# Altium PCB busanaliz.PcbDoc (part 2 of 2)
Units mm, origin at the board's own origin, x right, y up, seen from the top; angles counter-clockwise.
Board outline 118.11 x 70.87 mm, 4 copper layers (Component Side, Ground Plane, Power Plane, Solder Side), stack 0.862 mm thick; 100 components, 87 nets, 527 pads, 174 vias.
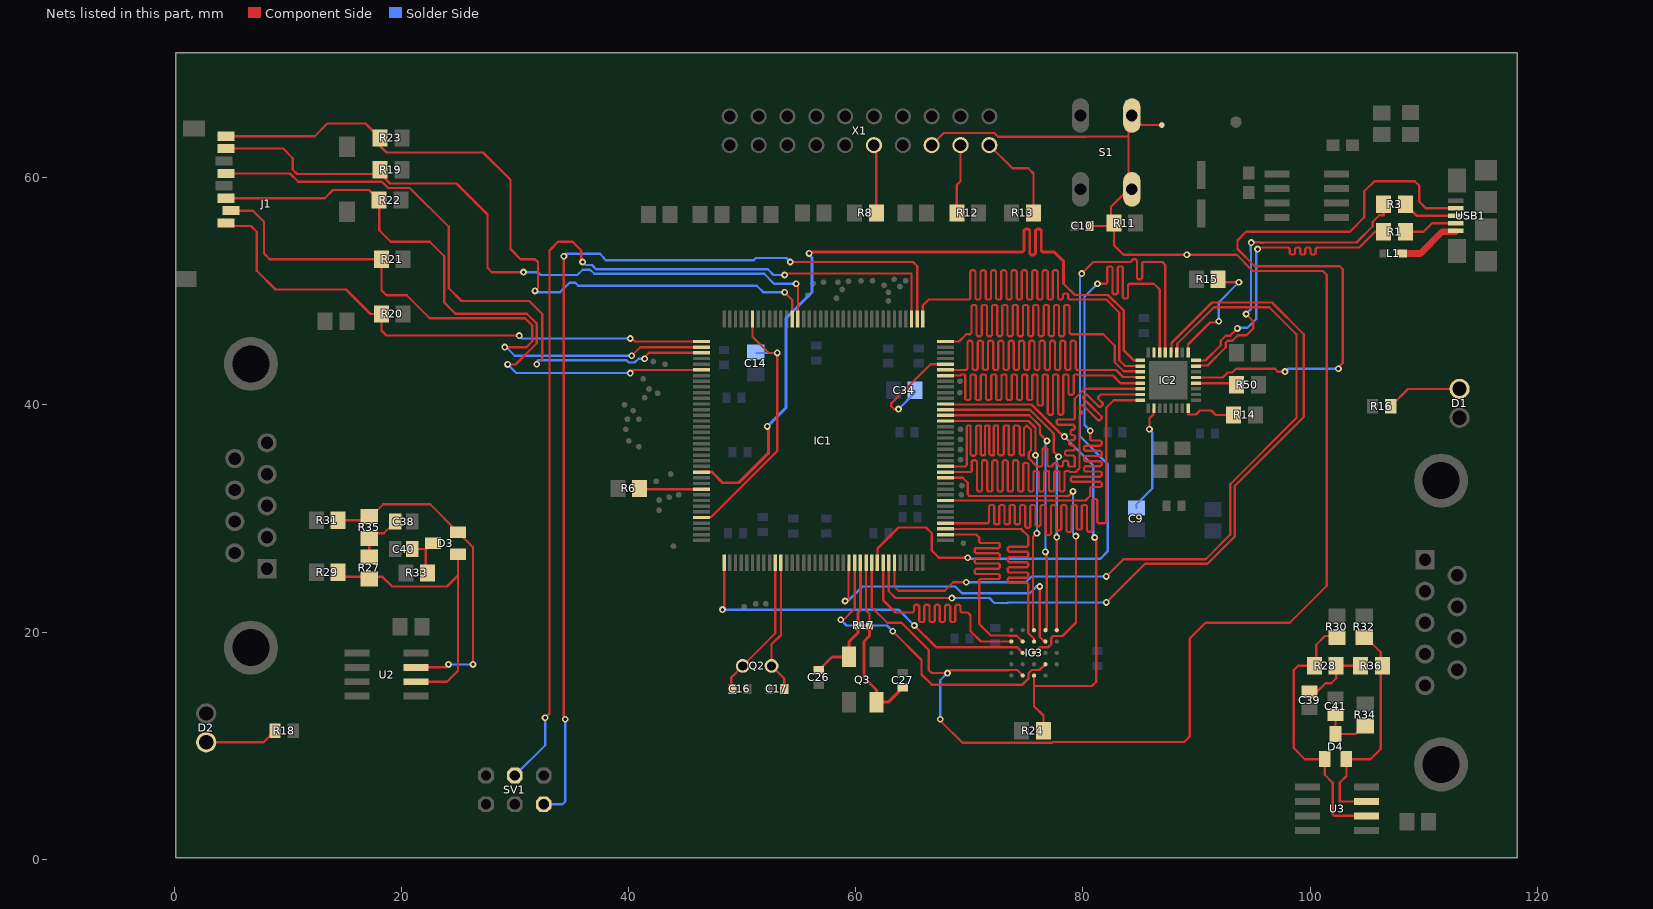
[diagram p4: the nets of this part, all layers, seen from the top]

## Via types
v1: diameter 0.6, hole 0.3, Component Side to Solder Side, 174 vias

## Nets (pads, with @x,y where several pads share a name; then routed paths per layer and width w, separated by ;. In a path a pad name is that pad's centre, name@x,y a point inside that pad or via, vN(x,y) a via of type N, cw(c..) or ccw(c..) an arc to the next point about the centre after c; other vN are vias at no path point) (continued)
NetC9_1: C9.1 IC2.26 | length 9.6
  Component Side w0.2: v1(85.852,37.846) 85.852,38.814 86.203,39.165 IC2.26@86.203,39.664
  Solder Side w0.2: C9.1@84.709,30.922 84.709,31.242 86.106,32.639 86.106,37.592 v1(85.852,37.846)
NetC16_2: C16.2 IC1.10 Q2.2 | length 12.8
  Component Side w0.2: C16.2@49.124,14.986 49.022,15.088 49.022,16.002 Q2.2@50.038,17.018 52.9,19.88 IC1.10@52.9,26.092
NetC17_2: C17.2 IC1.11 Q2.1 | length 11.9
  Component Side w0.2: IC1.11@53.4,26.092 53.4,19.745 52.578,18.923 Q2.1@52.578,17.018 53.695,15.901 C17.2@53.695,14.986
NetC26_1: C26.1 IC1.25 Q3.P$1 R17.2 | length 11.8
  Component Side w0.254: C26.1@56.743,16.652 57.899,17.808 Q3.P$1@59.411,17.808 59.411,19.152 60.198,19.939 R17.2@60.198,20.574 60.198,21.717 60.4,21.919 IC1.25@60.4,26.092
NetC27_1: C27.1 IC1.26 Q3.P$3 R17.1 | length 15.9
  Component Side w0.2: IC1.26@60.9,26.092 60.9,21.904 61.206,21.598 R17.1@61.206,20.574
  Component Side w0.254: R17.1@61.206,20.574 61.206,19.677 60.706,19.177 60.706,16.002 61.824,14.884 Q3.P$3@61.824,13.821 62.858,13.821 C27.1@64.135,15.098
NetC34_1: C34.1 IC1.68 | length 9.4
  Component Side w0.2: v1(63.754,39.624) 63.373,39.624 63.119,39.878 63.119,40.132 66.567,43.58 IC1.68@67.888,43.58
  Solder Side w0.2: v1(63.754,39.624) 65.212,41.082 C34.1@65.212,41.275
NetC38_1: C38.1 R27.1 R35.2 | length 4.7
  Component Side w0.2: R27.1@17.145,26.454 R27.1@17.145,26.604 R35.2@17.145,28.245 17.602,28.702 18.427,28.702 C38.1@19.443,29.718
NetC39_1: C39.1 R28.1 R36.2 | length 6.2
  Component Side w0.2: C39.1@99.949,14.72 100.572,14.72 101.346,15.494 101.854,15.494 102.296,15.936 R28.1@102.296,17.018 R36.2@104.445,17.018 R36.2@104.61,17.018
NetC40_1: C40.1 D3.3 R33.2 | length 3.9
  Component Side w0.2: C40.1@20.543,27.305 22.25,27.305 22.136,27.191 R33.2@22.136,25.199
NetC41_1: C41.1 D4.3 R34.2 | length 4.7
  Component Side w0.2: C41.1@102.235,12.712 D4.3@102.235,11.024 103.988,11.024 R34.2@104.864,11.9
NetD1_1: D1.1 R16.2 | length 6.7
  Component Side w0.2: R16.2@107.099,39.878 108.623,41.402 D1.1@113.157,41.402
NetD2_1: D2.1 R18.2 | length 6.5
  Component Side w0.2: D2.1@2.794,10.287 7.836,10.287 R18.2@8.852,11.303
NetD3_1: D3.1 R27.2 R29.1 U2.6 | length 26
  Component Side w0.2: R29.1@14.262,25.273 14.262,25.235 14.643,24.854 17.145,24.854 18.326,24.854 19.177,24.003 24.003,24.003 24.976,24.976 ; U2.6@21.285,15.621 24.003,15.621 24.976,16.594 24.976,24.976 ; D3.1@24.976,26.863 24.976,24.976
NetD3_2: D3.2 R31.1 R35.1 U2.7 | length 29.6
  Component Side w0.2: R31.1@14.262,29.845 R31.1@14.412,29.845 16.98,29.845 18.377,31.242 22.512,31.242 D3.2@24.976,28.778 26.289,27.465 v1(26.289,17.145) ; U2.7@21.285,16.891 23.876,16.891 v1(24.13,17.145)
  Solder Side w0.2: v1(24.13,17.145) v1(26.289,17.145)
NetD4_1: D4.1 R28.2 R30.1 U3.6 | length 24.3
  Component Side w0.2: R28.2@100.381,17.018 98.933,17.018 98.552,16.637 98.552,9.779 99.525,8.806 D4.1@101.285,8.806 101.285,7.427 101.981,6.731 101.981,3.937 102.108,3.81 U3.6@104.978,3.81 ; R28.2@100.546,17.018 100.546,18.885 101.308,19.647 102.362,19.647 R30.1@102.362,19.558
NetD4_2: D4.2 R32.1 R36.1 U3.7 | length 20.3
  Component Side w0.2: R32.1@104.775,19.647 106.21,18.212 106.21,9.69 105.326,8.806 D4.2@103.2,8.806 103.2,7.315 102.616,6.731 102.616,5.08 U3.7@104.978,5.08
NetIC1_135: IC1.135 R6.2 | length 5.5
  Component Side w0.2: R6.2@40.97,32.639 41.029,32.58 IC1.135@46.412,32.58
NetIC2_4: IC2.4 R50.2 | length 3.4
  Component Side w0.2: IC2.4@89.953,41.914 R50.2@93.392,41.914
NetIC2_9: IC2.9 R15.2 | length 10.4
  Component Side w0.2: IC2.9@89.253,44.614 89.253,45.311 91.186,47.244 91.948,47.244 v1(91.948,47.371) ; R15.2@91.897,51.054 92.151,50.8 v1(93.726,50.8)
  Solder Side w0.2: v1(91.948,47.371) 91.948,49.022 v1(93.726,50.8)
NetIC2_32: IC2.32 R14.2 | length 4.9
  Component Side w0.2: IC2.32@89.253,39.714 89.253,39.144 89.944,39.144 90.297,39.497 91.313,39.497 91.694,39.116 R14.2@93.269,39.116
NetL1_1: L1.1 USB1.V | length 5.5
  Component Side w0.6: L1.1@108.09,53.34 109.728,53.34 111.633,55.245 USB1.V@112.821,55.245
NetR1_1: R1.1 USB1.D- | length 4.7
  Component Side w0.2: R1.1@108.392,55.245 109.982,55.245 110.739,56.002 USB1.D-@112.821,56.002
NetR3_1: R3.1 USB1.D+ | length 4.8
  Component Side w0.2: R3.1@108.392,57.658 109.408,56.642 USB1.D+@112.821,56.642
NetR8_2: R8.2 X1.11 | length 6.1
  Component Side w0.2: X1.11@61.595,62.865 61.798,62.662 R8.2@61.798,56.896
NetR12_2: R12.2 X1.17 | length 6.1
  Component Side w0.2: R12.2@68.885,56.896 68.885,59.36 69.215,59.69 X1.17@69.215,62.865
NetR13_2: R13.2 X1.19 | length 8.4
  Component Side w0.2: X1.19@71.755,62.865 73.787,60.833 75.184,60.833 75.641,60.376 R13.2@75.641,56.896
OCTO_CLK: IC1.24 IC3.B2 | length 27.9
  Component Side w0.2: v1(58.674,21.082) 58.801,20.955 59.909,22.063 59.909,26.083 IC1.24@59.9,26.092 ; v1(63.246,20.066) 65.786,17.526 65.786,16.256 66.675,15.367 74.676,15.367 75.207,15.898 75.207,16.362 75.491,16.646 76.177,16.646 IC3.B2@76.692,17.161
  Solder Side w0.2: v1(58.674,21.082) 59.182,20.574 62.738,20.574 v1(63.246,20.066)
OCTO_DQS: IC1.48 IC3.C3 | length 29.1
  Component Side w0.2: IC1.48@67.888,33.58 69.417,33.58 69.85,33.147 69.85,32.131 70.001,31.98 78.716,31.98 v1(79.121,32.385) ; IC3.C3@75.692,18.161 76.2,18.669 76.962,18.669 77.207,18.914 77.207,19.498 77.355,19.646 78.193,19.646 79.375,20.828 v1(79.375,28.448)
  Solder Side w0.2: 79.121,28.702 v1(79.121,32.385)
OCTO_IO0: IC1.39 IC3.D3 | length 30.4
  Component Side w0.2: IC1.39@67.888,29.08 74.552,29.08 75.184,28.448 75.184,28.194 75.184,27.967 75.184,27.627 75.071,27.513 73.493,27.513 73.379,27.4 73.379,27.173 73.493,27.059 75.071,27.059 75.184,26.946 75.184,26.719 75.071,26.605 73.493,26.605 73.379,26.492 73.379,26.265 73.493,26.151 75.071,26.151 75.184,26.038 75.184,25.811 75.071,25.697 73.493,25.697 73.379,25.584 73.379,25.357 73.493,25.243 75.071,25.243 75.184,25.13 75.184,24.903 75.071,24.789 73.493,24.789 73.379,24.676 73.379,24.449 73.493,24.335 75.071,24.335 75.184,24.222 75.184,23.881 75.184,23.495 75.184,19.921 75.692,19.413 IC3.D3@75.692,19.161
OCTO_IO1: IC1.23 IC3.D2 | length 26.8
  Component Side w0.2: v1(59.055,22.733) 59.309,22.733 59.35,22.774 IC1.23@59.35,26.042 ; v1(76.2,24.003) 76.2,19.558 76.597,19.161 IC3.D2@76.692,19.161
  Solder Side w0.2: v1(59.055,22.733) 59.309,22.733 60.579,24.003 68.747,24.003 69.347,23.403 75.317,23.403 75.917,24.003 v1(76.2,24.003)
OCTO_IO2: IC1.1 IC3.C4 | length 32.1
  Component Side w0.2: v1@48.4,21.971 IC1.1@48.4,26.092 ; v1(65.151,20.574) 67.056,18.669 74.184,18.669 IC3.C4@74.692,18.161
  Solder Side w0.2: v1(48.26,21.971) 63.754,21.971 v1(65.151,20.574)
OCTO_IO3: IC1.38 IC3.D4 | length 31
  Component Side w0.2: IC1.38@67.888,28.58 70.607,28.58 70.866,28.321 70.866,28.067 70.866,27.953 70.979,27.84 72.557,27.84 72.671,27.726 72.671,27.499 72.557,27.386 70.866,27.386 70.572,27.386 70.458,27.272 70.458,27.045 70.572,26.932 70.866,26.932 72.557,26.932 72.671,26.818 72.671,26.591 72.557,26.478 70.866,26.478 70.572,26.478 70.458,26.364 70.458,26.137 70.572,26.024 70.866,26.024 72.557,26.024 72.671,25.91 72.671,25.683 72.557,25.57 70.866,25.57 70.572,25.57 70.458,25.456 70.458,25.229 70.572,25.116 70.866,25.116 72.557,25.116 72.671,25.003 72.671,24.776 72.557,24.662 70.979,24.662 70.866,24.549 70.866,24.208 70.866,24.13 70.866,20.701 71.882,19.685 73.482,19.685 73.491,19.676 74.177,19.676 IC3.D4@74.692,19.161
OCTO_IO4: IC1.29 IC3.D5 | length 29.1
  Component Side w0.2: IC1.29@62.4,26.092 62.4,22.817 63.5,21.717 64.897,21.717 65.01,21.717 65.124,21.83 65.124,22.292 65.237,22.406 65.464,22.406 65.578,22.292 65.578,21.717 65.578,20.999 65.691,20.885 65.918,20.885 66.032,20.999 66.032,21.717 66.032,22.292 66.145,22.406 66.372,22.406 66.486,22.292 66.486,21.717 66.486,20.999 66.599,20.885 66.826,20.885 66.94,20.999 66.94,21.717 66.94,22.292 67.053,22.406 67.28,22.406 67.394,22.292 67.394,21.717 67.394,20.999 67.507,20.885 67.734,20.885 67.848,20.999 67.848,21.717 67.848,22.292 67.961,22.406 68.188,22.406 68.302,22.292 68.302,21.717 68.302,20.999 68.415,20.885 68.642,20.885 68.756,20.999 68.756,21.717 68.756,22.292 68.869,22.406 69.096,22.406 69.21,22.292 69.21,21.83 69.323,21.717 69.596,21.717 69.85,21.717 70.104,21.463 70.104,20.066 71.009,19.161 IC3.D5@73.692,19.161
OCTO_IO5: IC1.58 IC3.E3 | length 26.5
  Component Side w0.2: IC1.58@67.888,38.58 75.212,38.58 75.819,37.973 v1(75.819,35.56) ; IC3.E3@75.692,20.161 75.6,20.253 75.6,28.356 v1(75.946,28.702)
  Solder Side w0.2: v1(75.819,35.56) 75.946,35.687 v1(75.946,28.702)
OCTO_IO6: IC1.59 IC3.E2 | length 27.1
  Component Side w0.2: IC1.59@67.888,39.08 75.278,39.08 76.219,38.139 76.219,37.446 v1(76.835,36.83) ; IC3.E2@76.692,20.161 76.8,20.269 76.8,26.943 v1(76.692,27.051)
  Solder Side w0.2: v1(76.692,27.051) 76.692,36.687 v1(76.835,36.83)
OCTO_IO7: IC1.60 IC3.E1 | length 28.2
  Component Side w0.2: IC1.60@67.888,39.58 75.343,39.58 77.435,37.488 77.435,35.849 v1(77.851,35.433) ; IC3.E1@77.692,20.161 v1(77.692,28.353)
  Solder Side w0.2: v1(77.692,28.353) 77.692,35.147 77.978,35.433 v1(77.851,35.433)
OCTO_NCS: IC1.61 IC3.A3 R24.1 | length 45.3
  Component Side w0.2: IC1.61@67.888,40.08 67.938,40.03 75.459,40.03 78.151,37.338 78.359,37.338 v1(78.359,37.211) ; IC3.A3@75.692,16.161 75.692,15.24 ; R24.1@76.515,11.303 76.515,12.639 75.692,13.462 75.692,15.24 ; v1(81.026,28.321) 81.172,28.175 81.172,15.621 80.791,15.24 75.692,15.24
  Solder Side w0.2: v1(78.359,37.211) 80.899,34.671 80.899,28.448 v1(81.026,28.321)
RESET: C10.1 IC1.27 IC3.A4 pad.68 R11.2 S1.3 S1.4 X1.15 | length 153.5
  Component Side w0.2: IC1.27@61.4,26.092 61.4,22.166 62.757,20.809 64.027,20.809 66.421,18.415 66.421,16.637 66.675,16.383 v1(68.072,16.383) 68.326,16.637 73.482,16.637 73.491,16.646 74.207,16.646 IC3.A4@74.692,16.161 ; X1.15@66.675,62.865 67.74,63.93 72.196,63.93 72.523,63.603 80.244,63.603 80.267,63.627 83.998,63.627 ; v1(67.437,12.319) 67.437,12.192 69.388,10.241 77.3,10.241 77.365,10.306 88.919,10.306 89.408,10.795 89.408,19.431 90.786,20.809 98.21,20.809 101.473,24.072 101.473,51.435 101.111,51.797 94.957,51.797 93.541,53.213 v1(89.154,53.213) 83.566,53.213 82.728,54.051 R11.2@82.728,56.007 ; C10.1@80.584,55.753 82.474,55.753 82.474,57.455 83.998,58.979 83.998,63.627 ; pad.68@86.944,64.643 85.141,64.643 S1.4@84.303,65.481 83.998,65.176 83.998,63.627
  Solder Side w0.2: v1(67.437,12.319) 67.437,15.748 v1(68.072,16.383)
SD_CLK: IC1.111 J1.5 | length 56.1
  Component Side w0.2: J1.5@4.552,60.382 10.173,60.382 10.91,59.644 18.276,59.644 18.819,59.101 20.728,59.101 24.149,55.68 24.149,50.273 25.273,49.149 31.242,49.149 32.385,48.006 32.385,44.069 v1(31.896,43.58) ; v1(41.402,44.069) 41.402,44.196 41.786,44.58 IC1.111@46.412,44.58
  Solder Side w0.2: v1(31.896,43.58) 31.896,43.815 32.004,43.923 39.81,43.923 40.01,43.723 40.508,43.723 40.854,44.069 v1(41.402,44.069)
SD_CMD: IC1.114 J1.3 R22.1 | length 59
  Component Side w0.2: J1.3@4.552,58.197 13.239,58.197 13.97,58.928 17.14,58.928 R22.1@18.029,58.039 18.029,55.377 19.05,54.356 22.479,54.356 23.749,53.086 23.749,49.022 24.746,48.025 31.027,48.025 31.896,47.156 31.896,45.427 30.03,43.561 v1(29.337,43.561) ; v1(40.132,42.799) 40.413,43.08 IC1.114@46.412,43.08
  Solder Side w0.2: v1(29.337,43.561) 30.099,42.799 v1(40.132,42.799)
SD_D0: IC1.95 J1.7 R19.1 | length 62.3
  Component Side w0.2: J1.7@4.552,62.566 9.57,62.566 10.414,61.722 10.414,60.706 10.795,60.325 18.161,60.325 18.985,59.501 24.827,59.501 27.559,56.769 27.559,52.07 27.94,51.689 v1(30.734,51.689) ; v1(54.737,50.673) 54.737,50.8 54.9,50.637 IC1.95@54.9,47.568
  Solder Side w0.2: v1(30.734,51.689) 32.004,51.689 32.258,51.435 35.473,51.435 35.946,51.908 36.594,51.908 36.962,51.54 51.925,51.54 52.792,50.673 v1(54.737,50.673)
SD_D1: IC1.96 J1.8 R23.1 | length 64.9
  Component Side w0.2: J1.8@4.552,63.658 12.35,63.658 13.462,64.77 16.83,64.77 R23.1@18.1,63.5 18.1,62.799 18.669,62.23 27.178,62.23 29.591,59.817 29.591,53.721 30.48,52.832 31.75,52.832 32.004,52.578 32.004,50.292 v1(31.75,50.038) ; v1(53.721,49.911) 54.4,49.232 IC1.96@54.4,47.568
  Solder Side w0.2: v1(31.75,50.038) 31.877,49.911 33.949,49.911 34.803,50.765 35.301,50.765 35.566,50.5 51.267,50.5 51.856,49.911 v1(53.721,49.911)
SD_D2: IC1.109 J1.1 R20.1 | length 49.2
  Component Side w0.2: J1.1@4.552,56.013 4.812,55.753 6.731,55.753 7.239,55.245 7.239,51.816 8.89,50.165 15.113,50.165 17.272,48.006 R20.1@18.227,48.006 18.227,46.543 18.669,46.101 v1(30.353,46.101) ; v1(40.132,45.847) 40.132,45.974 40.526,45.58 IC1.109@46.412,45.58
  Solder Side w0.2: v1(30.353,46.101) 30.607,45.847 v1(40.132,45.847)
SD_D3: IC1.110 J1.2 R21.1 | length 55.9
  Component Side w0.2: J1.2@4.959,57.105 6.903,57.105 7.874,56.134 7.874,53.34 8.382,52.832 R21.1@18.227,52.832 18.227,50.099 18.669,49.657 20.447,49.657 22.479,47.625 30.861,47.625 31.496,46.99 31.496,45.593 30.988,45.085 v1(29.083,45.085) ; v1(40.259,44.323) 41.016,45.08 IC1.110@46.412,45.08
  Solder Side w0.2: v1(29.083,45.085) 29.21,45.085 29.972,44.323 v1(40.259,44.323)
ULPI_CK: IC1.44 IC2.14 | length 68.8
  Component Side w0.2: IC1.44@67.888,31.58 80.221,31.58 80.645,32.004 80.645,32.385 80.645,32.658 80.758,32.771 81.529,32.771 81.642,32.885 81.642,33.112 81.529,33.225 80.645,33.225 79.035,33.225 78.922,33.339 78.922,33.566 79.035,33.679 80.645,33.679 81.529,33.679 81.642,33.793 81.642,34.02 81.529,34.133 80.645,34.133 80.197,34.133 80.084,34.247 80.084,34.474 80.197,34.587 80.645,34.587 81.529,34.587 81.642,34.701 81.642,34.928 81.529,35.041 80.645,35.041 80.197,35.041 80.084,35.155 80.084,35.382 80.197,35.495 80.645,35.495 81.529,35.495 81.642,35.609 81.642,35.836 81.529,35.949 80.645,35.949 80.197,35.949 80.084,36.063 80.084,36.29 80.197,36.403 80.645,36.403 81.529,36.403 81.642,36.517 81.642,36.744 81.529,36.857 80.758,36.857 80.645,36.971 80.645,37.084 v1(80.645,37.719) ; v1(81.28,50.673) 81.915,50.673 82.028,50.673 82.142,50.786 82.142,52.064 82.255,52.178 82.482,52.178 82.596,52.064 82.596,50.673 82.596,49.853 82.709,49.74 82.936,49.74 83.05,49.853 83.05,50.673 83.05,52.064 83.163,52.178 83.39,52.178 83.504,52.064 83.504,50.673 83.504,49.49 83.617,49.376 83.844,49.376 83.958,49.49 83.958,50.56 84.071,50.673 84.074,50.673 84.582,50.673 86.233,50.673 86.753,50.153 IC2.14@86.753,44.614
  Solder Side w0.2: v1(80.645,37.719) 80.137,38.227 80.137,49.53 v1(81.28,50.673)
ULPI_D0: IC1.40 IC2.24 | length 70.4
  Component Side w0.2: IC1.40@67.888,29.58 71.501,29.58 71.614,29.58 71.728,29.693 71.728,31.067 71.841,31.18 72.068,31.18 72.182,31.067 72.182,29.58 72.282,29.48 72.536,29.48 72.636,29.58 72.636,31.067 72.749,31.18 72.976,31.18 73.09,31.067 73.09,29.58 73.19,29.48 73.444,29.48 73.544,29.58 73.544,31.067 73.657,31.18 73.884,31.18 73.998,31.067 73.998,29.58 74.098,29.48 74.352,29.48 74.452,29.58 74.452,31.067 74.565,31.18 74.792,31.18 74.906,31.067 74.906,29.58 74.906,29.292 75.019,29.178 75.246,29.178 75.36,29.292 75.36,29.58 75.36,31.067 75.473,31.18 75.7,31.18 75.814,31.067 75.814,29.58 75.814,29.415 75.927,29.302 76.154,29.302 76.268,29.415 76.268,29.58 76.268,31.067 76.381,31.18 76.608,31.18 76.722,31.067 76.722,29.58 76.722,28.659 76.835,28.546 77.062,28.546 77.176,28.659 77.176,29.58 77.176,31.067 77.289,31.18 77.516,31.18 77.63,31.067 77.63,29.58 77.63,29.064 77.743,28.951 77.97,28.951 78.084,29.064 78.084,29.58 78.084,31.067 78.197,31.18 78.424,31.18 78.538,31.067 78.538,29.58 78.538,28.913 78.651,28.8 78.878,28.8 78.992,28.913 78.992,29.58 78.992,31.067 79.105,31.18 79.332,31.18 79.446,31.067 79.446,29.58 79.446,29.132 79.559,29.019 79.786,29.019 79.9,29.132 79.9,29.58 79.9,31.067 80.013,31.18 80.24,31.18 80.354,31.067 80.354,29.58 80.354,28.935 80.467,28.821 80.694,28.821 80.808,28.935 80.808,29.58 80.808,31.601 80.921,31.715 81.148,31.715 81.262,31.601 81.262,29.693 81.375,29.58 81.661,29.58 81.904,29.58 82.042,29.718 82.042,39.751 82.705,40.414 IC2.24@85.053,40.414
ULPI_D1: IC1.49 IC2.23 | length 71.3
  Component Side w0.2: IC1.49@67.888,34.08 69.977,34.08 ; 69.215,34.08 69.977,34.08 ; IC2.23@85.053,40.914 81.554,40.914 81.344,40.704 81.344,40.544 81.728,40.16 81.728,39.999 81.568,39.839 81.407,39.839 80.943,40.303 80.354,40.893 80.193,40.893 80.033,40.732 80.033,40.571 80.622,39.982 81.642,38.962 81.642,38.802 81.482,38.641 81.321,38.641 80.301,39.661 80.005,39.957 79.844,39.957 79.684,39.797 79.684,39.636 79.9,39.42 79.9,39.26 79.819,39.179 79.684,39.044 79.684,34.414 79.35,34.08 78.994,34.08 78.83,34.08 78.73,34.18 78.476,34.18 78.376,34.08 78.376,32.493 78.262,32.38 78.035,32.38 77.922,32.493 77.922,34.08 77.822,34.18 77.568,34.18 77.468,34.08 77.468,32.493 77.354,32.38 77.127,32.38 77.014,32.493 77.014,34.08 76.914,34.18 76.66,34.18 76.56,34.08 76.56,32.493 76.446,32.38 76.219,32.38 76.106,32.493 76.106,34.08 76.006,34.18 75.752,34.18 75.652,34.08 75.652,32.493 75.538,32.38 75.311,32.38 75.198,32.493 75.198,34.08 75.198,34.767 75.084,34.88 74.857,34.88 74.744,34.767 74.744,34.08 74.744,32.493 74.63,32.38 74.403,32.38 74.29,32.493 74.29,34.08 74.29,35.006 74.176,35.119 73.949,35.119 73.836,35.006 73.836,34.08 73.836,32.493 73.722,32.38 73.495,32.38 73.382,32.493 73.382,34.08 73.382,35.006 73.268,35.119 73.041,35.119 72.928,35.006 72.928,34.08 72.928,32.493 72.814,32.38 72.587,32.38 72.474,32.493 72.474,34.08 72.474,35.006 72.36,35.119 72.133,35.119 72.02,35.006 72.02,34.08 72.02,32.493 71.906,32.38 71.679,32.38 71.566,32.493 71.566,34.08 71.566,35.006 71.452,35.119 71.225,35.119 71.112,35.006 71.112,34.08 71.112,32.493 70.998,32.38 70.771,32.38 70.658,32.493 70.658,34.08 70.658,35.006 70.544,35.119 70.317,35.119 70.204,35.006 70.204,34.194 70.09,34.08 69.977,34.08
ULPI_D2: IC1.50 IC2.22 | length 70.4
  Component Side w0.2: IC1.50@67.888,34.58 69.632,34.58 69.765,34.713 69.765,38.003 69.764,38.004 69.764,38.094 69.85,38.18 70.104,38.18 70.104,35.646 70.231,35.519 70.444,35.519 70.612,35.687 70.612,38.1 70.692,38.18 70.993,38.18 70.993,35.646 71.079,35.56 71.374,35.56 71.374,38.1 71.454,38.18 71.755,38.18 71.755,35.687 71.882,35.56 72.136,35.56 72.136,38.1 72.216,38.18 72.517,38.18 72.517,35.687 72.644,35.56 72.898,35.56 73.025,35.687 73.025,38.1 73.105,38.18 73.453,38.18 73.453,35.64 73.533,35.56 73.787,35.56 73.914,35.687 73.914,38.1 73.994,38.18 74.295,38.18 74.422,38.053 74.422,35.687 74.549,35.56 74.803,35.56 74.803,37.937 75.046,38.18 75.419,37.807 75.419,36.009 75.219,35.809 75.219,35.311 75.95,34.58 76.2,34.58 76.313,34.58 76.427,34.694 76.427,36.12 76.54,36.234 76.767,36.234 76.881,36.12 76.881,34.694 76.994,34.58 77.221,34.58 77.335,34.694 77.335,34.746 77.448,34.859 77.675,34.859 77.789,34.746 77.789,34.694 77.902,34.58 78.129,34.58 78.243,34.694 78.243,34.977 78.356,35.09 78.583,35.09 78.697,34.977 78.697,34.694 78.81,34.58 79.151,34.58 79.284,34.58 79.284,35.306 79.284,35.419 79.17,35.533 78.525,35.533 78.412,35.646 78.412,35.873 78.525,35.987 79.17,35.987 79.284,36.1 79.284,36.327 79.17,36.441 78.891,36.441 78.778,36.554 78.778,36.781 78.891,36.895 79.17,36.895 79.284,37.008 79.284,37.235 79.17,37.349 79.017,37.349 78.904,37.462 78.904,37.689 79.017,37.803 79.17,37.803 79.284,37.916 79.284,38.143 79.17,38.257 77.798,38.257 77.684,38.37 77.684,38.597 77.798,38.711 79.17,38.711 79.284,38.824 79.284,38.989 79.284,40.549 80.149,41.414 IC2.22@85.053,41.414
ULPI_D3: IC1.66 IC2.21 | length 69.5
  Component Side w0.2: IC1.66@67.888,42.58 68.961,42.58 69.188,42.58 69.288,42.68 69.542,42.68 69.642,42.58 69.642,40.543 69.755,40.43 69.982,40.43 70.096,40.543 70.096,42.58 70.196,42.68 70.45,42.68 70.55,42.58 70.55,40.543 70.663,40.43 70.89,40.43 71.004,40.543 71.004,42.58 71.104,42.68 71.358,42.68 71.458,42.58 71.458,40.543 71.571,40.43 71.798,40.43 71.912,40.543 71.912,42.58 72.012,42.68 72.266,42.68 72.366,42.58 72.366,40.543 72.479,40.43 72.706,40.43 72.82,40.543 72.82,42.58 72.92,42.68 73.174,42.68 73.274,42.58 73.274,40.543 73.387,40.43 73.614,40.43 73.728,40.543 73.728,42.58 73.828,42.68 74.082,42.68 74.182,42.58 74.182,40.543 74.295,40.43 74.522,40.43 74.636,40.543 74.636,42.58 74.736,42.68 74.99,42.68 75.09,42.58 75.09,40.543 75.203,40.43 75.43,40.43 75.544,40.543 75.544,42.58 75.644,42.68 75.898,42.68 75.998,42.58 75.998,40.057 76.111,39.943 76.338,39.943 76.452,40.057 76.452,42.58 76.552,42.68 76.806,42.68 76.906,42.58 76.906,39.247 77.019,39.133 77.246,39.133 77.36,39.247 77.36,42.58 77.46,42.68 77.714,42.68 77.814,42.58 77.814,39.247 77.927,39.133 78.154,39.133 78.268,39.247 78.268,42.58 78.368,42.68 78.622,42.68 78.722,42.58 78.722,41.007 78.835,40.893 79.062,40.893 79.176,41.007 79.176,42.58 79.276,42.68 79.53,42.68 79.63,42.58 80.01,42.58 82.642,42.58 83.308,41.914 IC2.21@85.053,41.914
ULPI_D4: IC1.67 IC2.20 | length 70.9
  Component Side w0.2: IC1.67@67.888,43.08 69.596,43.08 69.709,43.08 69.823,43.194 69.823,45.533 69.936,45.647 70.163,45.647 70.277,45.533 70.277,43.194 70.39,43.08 70.617,43.08 70.731,43.194 70.731,45.533 70.844,45.647 71.071,45.647 71.185,45.533 71.185,43.194 71.298,43.08 71.525,43.08 71.639,43.194 71.639,45.533 71.752,45.647 71.979,45.647 72.093,45.533 72.093,43.194 72.206,43.08 72.433,43.08 72.547,43.194 72.547,45.533 72.66,45.647 72.887,45.647 73.001,45.533 73.001,43.194 73.114,43.08 73.341,43.08 73.455,43.194 73.455,45.533 73.568,45.647 73.795,45.647 73.909,45.533 73.909,43.194 74.022,43.08 74.249,43.08 74.363,43.194 74.363,45.533 74.476,45.647 74.703,45.647 74.817,45.533 74.817,43.194 74.93,43.08 75.157,43.08 75.271,43.194 75.271,45.533 75.384,45.647 75.611,45.647 75.725,45.533 75.725,43.194 75.838,43.08 76.065,43.08 76.179,43.194 76.179,45.533 76.292,45.647 76.519,45.647 76.633,45.533 76.633,43.194 76.746,43.08 76.973,43.08 77.087,43.194 77.087,45.533 77.2,45.647 77.427,45.647 77.541,45.533 77.541,43.194 77.654,43.08 77.881,43.08 77.995,43.194 77.995,45.533 78.108,45.647 78.335,45.647 78.449,45.533 78.449,43.194 78.562,43.08 78.789,43.08 78.903,43.194 78.903,45.533 79.016,45.647 79.243,45.647 79.357,45.533 79.357,43.194 79.47,43.08 79.811,43.08 79.883,43.08 82.916,43.08 83.532,42.464 IC2.20@85.003,42.464
ULPI_D5: IC1.72 IC2.19 | length 71.6
  Component Side w0.2: IC1.72@67.888,45.58 69.075,45.58 69.723,46.228 69.95,46.228 70.063,46.228 70.177,46.341 70.177,48.681 70.29,48.795 70.517,48.795 70.631,48.681 70.631,46.228 70.631,46.16 70.744,46.047 70.971,46.047 71.085,46.16 71.085,46.228 71.085,48.681 71.198,48.795 71.425,48.795 71.539,48.681 71.539,46.228 71.539,46.16 71.652,46.047 71.879,46.047 71.993,46.16 71.993,46.228 71.993,48.681 72.106,48.795 72.333,48.795 72.447,48.681 72.447,46.228 72.447,46.16 72.56,46.047 72.787,46.047 72.901,46.16 72.901,46.228 72.901,48.681 73.014,48.795 73.241,48.795 73.355,48.681 73.355,46.228 73.355,46.16 73.468,46.047 73.695,46.047 73.809,46.16 73.809,46.228 73.809,48.681 73.922,48.795 74.149,48.795 74.263,48.681 74.263,46.228 74.263,46.16 74.376,46.047 74.603,46.047 74.717,46.16 74.717,46.228 74.717,48.681 74.83,48.795 75.057,48.795 75.171,48.681 75.171,46.228 75.171,46.16 75.284,46.047 75.511,46.047 75.625,46.16 75.625,46.228 75.625,48.681 75.738,48.795 75.965,48.795 76.079,48.681 76.079,46.228 76.079,46.16 76.192,46.047 76.419,46.047 76.533,46.16 76.533,46.228 76.533,48.681 76.646,48.795 76.873,48.795 76.987,48.681 76.987,46.228 76.987,46.16 77.1,46.047 77.327,46.047 77.441,46.16 77.441,46.228 77.441,48.681 77.554,48.795 77.781,48.795 77.895,48.681 77.895,46.228 77.895,46.16 78.008,46.047 78.235,46.047 78.349,46.16 78.349,46.228 78.349,48.681 78.462,48.795 78.689,48.795 78.803,48.681 78.803,46.341 78.916,46.228 78.994,46.228 81.788,46.228 82.801,45.215 82.801,43.76 83.597,42.964 85.003,42.964 IC2.19@85.053,42.914
ULPI_D6: IC1.73 IC2.18 | length 70.1
  Component Side w0.2: IC1.73@65.9,47.568 65.9,48.755 66.421,49.276 69.85,49.276 69.963,49.276 70.077,49.389 70.077,51.729 70.19,51.843 70.417,51.843 70.531,51.729 70.531,49.389 70.644,49.276 70.871,49.276 70.985,49.389 70.985,51.729 71.098,51.843 71.325,51.843 71.439,51.729 71.439,49.389 71.552,49.276 71.779,49.276 71.893,49.389 71.893,51.729 72.006,51.843 72.233,51.843 72.347,51.729 72.347,49.389 72.46,49.276 72.687,49.276 72.801,49.389 72.801,51.729 72.914,51.843 73.141,51.843 73.255,51.729 73.255,49.389 73.368,49.276 73.595,49.276 73.709,49.389 73.709,51.729 73.822,51.843 74.049,51.843 74.163,51.729 74.163,49.389 74.276,49.276 74.503,49.276 74.617,49.389 74.617,51.729 74.73,51.843 74.957,51.843 75.071,51.729 75.071,49.389 75.184,49.276 75.411,49.276 75.525,49.389 75.525,51.729 75.638,51.843 75.865,51.843 75.979,51.729 75.979,49.389 76.092,49.276 76.319,49.276 76.433,49.389 76.433,51.729 76.546,51.843 76.773,51.843 76.887,51.729 76.887,49.389 77,49.276 77.227,49.276 77.341,49.389 77.341,51.729 77.454,51.843 77.681,51.843 77.795,51.729 77.795,49.389 77.908,49.276 78.135,49.276 78.249,49.389 78.249,49.698 78.362,49.812 78.589,49.812 78.703,49.698 78.703,49.389 78.816,49.276 79.157,49.276 79.248,49.276 82.042,49.276 83.201,48.117 83.201,43.926 83.713,43.414 IC2.18@85.053,43.414
ULPI_D7: IC1.132 IC2.17 | length 71
  Component Side w0.2: 78.294,50.673 79.291,49.676 82.208,49.676 83.601,48.283 83.601,44.796 84.483,43.914 IC2.17@85.053,43.914
  Component Side w0.254: IC1.132@46.412,34.08 47.327,34.08 48.26,33.147 49.687,33.147 52.324,35.784 52.324,38.1 v1(52.197,38.1) ; v1@56.007,53.467 74.549,53.467 74.676,53.467 74.803,53.594 74.803,55.372 74.93,55.499 75.184,55.499 75.311,55.372 75.311,53.467 75.311,53.34 75.438,53.213 75.692,53.213 75.819,53.34 75.819,53.467 75.819,55.372 75.946,55.499 76.2,55.499 76.327,55.372 76.327,53.594 76.454,53.467 76.708,53.467 77.47,53.467 78.294,52.643 78.294,50.673
  Solder Side w0.254: v1(52.197,38.1) 53.848,39.751 53.848,47.625 56.134,49.911 56.134,52.959 55.88,53.213 v1(55.88,53.34)
ULPI_DIR: IC1.30 IC2.12 | length 71.3
  Component Side w0.2: IC1.30@62.9,26.092 62.9,23.587 63.5,22.987 v1(68.453,22.987) ; v1(82.042,22.606) 85.452,26.016 90.971,26.016 93.364,28.409 93.364,32.854 99.441,38.931 99.441,46.212 96.647,49.006 91.363,49.006 87.803,45.446 87.803,44.614 IC2.12@87.753,44.614
  Solder Side w0.2: v1(68.453,22.987) 71.763,22.987 72.19,22.56 73.352,22.56 73.398,22.606 v1(82.042,22.606)
ULPI_NXT: IC1.31 IC2.11 | length 67.5
  Component Side w0.2: IC1.31@63.4,26.092 63.4,23.976 63.754,23.622 67.818,23.622 68.58,24.384 v1(69.723,24.384) ; v1(82.042,24.892) 83.566,26.416 90.805,26.416 92.964,28.575 92.964,33.02 98.806,38.862 98.806,46.228 ; IC2.11@88.253,44.614 88.303,44.664 88.303,45.38 91.529,48.606 96.393,48.606 98.771,46.228
  Solder Side w0.2: v1(69.723,24.384) 74.97,24.384 75.478,24.892 v1(82.042,24.892)
ULPI_STP: IC1.28 IC2.13 | length 68.9
  Component Side w0.2: IC1.28@61.9,26.092 61.9,27.356 63.754,29.21 66.167,29.21 66.675,28.702 66.675,27.178 67.31,26.543 v1(69.85,26.543) ; v1(79.883,51.562) 80.899,52.578 84.074,52.578 84.187,52.578 84.301,52.691 84.301,52.7 84.414,52.813 84.641,52.813 84.755,52.7 84.755,52.578 84.755,51.186 84.868,51.073 85.095,51.073 85.209,51.186 85.209,52.465 85.322,52.578 85.471,52.578 86.995,52.578 87.249,52.324 IC2.13@87.249,44.618 ; IC2.13@87.253,44.614 IC2.13@87.303,44.614
  Solder Side w0.2: v1(69.85,26.543) 69.942,26.451 81.534,26.451 82.169,27.086 82.169,34.798 79.737,37.23 79.737,51.416 v1(79.883,51.562)
USART_RX: IC1.75 SV1.3 | length 86
  Component Side w0.2: v1(32.639,12.446) 33.02,12.827 33.02,53.594 33.782,54.356 35.052,54.356 35.814,53.594 35.814,52.451 v1(35.941,52.578) ; v1(53.721,51.435) 53.594,51.435 53.718,51.559 64.9,51.559 IC1.75@64.9,47.568
  Solder Side w0.2: SV1.3@29.972,7.366 32.639,10.033 v1(32.639,12.446) ; v1(35.941,52.578) 36.211,52.308 36.759,52.308 37.127,51.94 52.24,51.94 52.745,51.435 v1(53.721,51.435)
USART_TX: IC1.74 SV1.2 | length 86.9
  Component Side w0.2: v1(34.29,53.086) 34.29,12.573 34.544,12.319 v1(34.417,12.319) ; v1(54.229,52.578) 65.024,52.578 65.4,52.202 IC1.74@65.4,47.568
  Solder Side w0.2: SV1.2@32.512,4.826 34.163,4.826 34.417,5.08 v1(34.417,12.319) ; v1(34.29,53.086) 34.509,53.305 37.46,53.305 37.811,52.954 37.811,52.907 37.978,52.74 51.014,52.74 51.198,52.924 53.883,52.924 v1(54.229,52.578) v1@54.062,52.578
USB_OTG_HS_DM: IC2.8 R1.2 | length 27.8
  Component Side w0.2: IC2.8@89.953,43.914 90.777,43.914 92.124,45.261 92.124,45.651 92.565,46.093 92.956,46.093 v1(93.599,46.736) ; v1(95.377,53.721) 95.504,53.848 97.536,53.848 97.763,53.848 98.103,53.848 98.217,53.735 98.217,53.359 98.33,53.246 98.557,53.246 98.671,53.359 98.671,53.735 98.784,53.848 99.011,53.848 99.125,53.735 99.125,53.359 99.238,53.246 99.465,53.246 99.579,53.359 99.579,53.735 99.692,53.848 99.919,53.848 100.033,53.735 100.033,53.359 100.146,53.246 100.373,53.246 100.487,53.359 100.487,53.735 100.6,53.848 100.941,53.848 101.395,53.848 101.413,53.848 104.319,53.848 105.716,55.245 R1.2@106.477,55.245
  Solder Side w0.2: v1(93.599,46.736) 93.653,46.79 94.476,46.79 95.25,47.564 95.25,53.594 v1(95.377,53.721)
USB_OTG_HS_DP: IC2.7 R3.2 | length 28.8
  Component Side w0.2: IC2.7@89.953,43.414 89.999,43.46 90.965,43.46 92.578,45.073 92.578,45.463 92.753,45.639 93.144,45.639 93.641,46.136 94.396,46.136 94.996,46.736 94.996,47.371 v1(94.361,48.006) ; v1(94.811,54.287) 94.846,54.321 95.626,54.321 95.66,54.287 95.87,54.287 95.885,54.302 104.086,54.302 105.516,55.732 105.516,56.131 106.078,56.693 106.477,56.693 R3.2@106.477,57.658
  Solder Side w0.2: v1@94.361,47.752 v1(94.361,48.006) 94.796,48.441 94.796,53.453 94.777,53.472 94.777,54.252 v1(94.811,54.287)
USB_OTG_HS_ID: IC2.5 USB1.ID | length 57.3
  Component Side w0.2: IC2.5@89.953,42.414 92.307,42.414 92.738,42.845 93.137,42.845 93.472,43.18 96.901,43.18 97.155,42.926 v1(97.79,42.926) ; v1(102.489,43.18) 102.616,43.307 102.616,43.434 102.87,43.688 102.87,51.943 102.616,52.197 95.123,52.197 93.599,53.721 93.599,54.483 94.361,55.245 103.505,55.245 104.775,56.515 104.775,58.801 105.664,59.69 109.22,59.69 109.601,59.309 109.601,57.912 110.211,57.302 USB1.ID@112.821,57.302
  Solder Side w0.2: v1(97.79,42.926) 98.044,43.18 v1(102.489,43.18)
VCAP2: C14.1 IC1.103 IC1.140 | length 23.9
  Component Side w0.2: IC1.140@46.412,30.08 46.462,30.13 47.274,30.13 53.086,35.942 v1(53.086,44.577) 52.324,44.577 50.9,46.001 IC1.103@50.9,47.568
  Solder Side w0.2: C14.1@51.242,44.577 v1(53.086,44.577)
VDD18_1: IC2.15
pads on no net: IC1.4 IC1.5 IC1.9 IC1.37 IC1.43 IC1.45 IC1.46 IC1.47 IC1.51 IC1.52 IC1.53 IC1.54 IC1.57 IC1.62 IC1.63 IC1.64 IC1.65 IC1.76 IC1.77 IC1.78 IC1.81 IC1.82 IC1.83 IC1.84 IC1.85 IC1.86 IC1.87 IC1.88 IC1.90 IC1.91 IC1.93 IC1.94 IC1.97 IC1.98 IC1.112 IC1.113 IC1.115 IC1.116 IC1.117 IC1.120 IC1.121 IC1.122 IC1.123 IC1.124 IC1.125 IC1.126 IC1.127 IC1.133 IC1.134 IC1.136 IC1.137 IC1.138 IC1.139 IC1.142 IC2.3 IC2.10 IC3.A2 IC3.A5 IC3.B5 IC3.C2 IC3.C5 J2.1 J2.4 J2.5 J2.6 J2.8 J2.9 J2.10 J2.11 J3.1 J3.4 J3.5 J3.6 J3.8 J3.9 J3.10 J3.11 U1.4
copper on no net: | length 166.7
  Component Side w0.2: 39.624,40.005 39.878,40.259 40.386,40.259 40.598,40.047 40.614,40.047 40.637,40.024 40.875,40.024 41.187,40.024 41.631,39.58 46.412,39.58 ; 39.878,37.719 40.017,37.58 46.412,37.58 ; 39.878,38.735 40.533,38.08 46.412,38.08 ; 40.005,36.83 40.255,37.08 46.412,37.08 ; 40.386,39.497 40.513,39.624 41.021,39.624 41.565,39.08 46.412,39.08 ; 40.894,36.322 41.152,36.58 46.412,36.58 ; 40.894,38.735 41.049,38.58 46.412,38.58 ; 41.275,42.291 41.564,42.58 46.412,42.58 ; 41.402,40.64 41.962,40.08 46.412,40.08 ; 41.783,41.402 42.461,42.08 46.412,42.08 ; 42.164,43.815 42.429,44.08 46.412,44.08 ; 42.418,33.274 42.612,33.08 46.412,33.08 ; 42.545,41.021 43.104,41.58 46.412,41.58 ; 42.672,30.734 42.826,30.58 46.412,30.58 ; 42.672,31.623 43.215,31.08 46.412,31.08 ; 43.199,43.58 46.412,43.58 ; 43.561,31.877 43.858,31.58 46.412,31.58 ; 43.688,33.909 44.017,33.58 46.412,33.58 ; 43.942,27.559 43.942,27.813 45.209,29.08 46.412,29.08 ; 44.399,32.08 46.412,32.08 ; 49.9,26.092 49.9,22.49 50.165,22.225 ; 50.4,26.092 50.4,23.26 51.181,22.479 ; 52.07,22.479 52.4,22.709 52.4,26.092 ; 55.4,47.568 55.4,49.304 55.753,49.657 ; 55.9,47.568 55.9,48.661 56.388,49.149 56.388,50.546 56.261,50.673 ; 56.9,47.568 56.9,50.55 57.15,50.8 ; 57.4,47.568 57.4,49.78 58.42,50.8 ; 58.293,49.403 58.4,49.296 58.4,47.568 ; 58.801,50.165 58.9,50.066 58.9,47.568 ; 59.309,50.927 59.4,50.836 59.4,47.568 ; 59.9,47.568 59.9,50.375 60.452,50.927 ; 60.4,47.568 60.4,49.859 61.468,50.927 ; 60.9,47.568 60.9,49.47 61.976,50.546 62.103,50.546 62.484,50.546 ; 61.4,47.568 61.4,49.081 62.103,49.784 62.865,49.911 ; 61.9,47.568 61.9,48.946 62.103,49.149 62.865,49.149 ; 63.119,50.927 62.984,50.792 62.984,50.538 63.4,50.122 63.4,47.568 ; 63.9,47.568 63.9,49.892 63.9,50.4 ; 64.389,50.927 64.4,47.568 ; 67.888,28.08 69.202,28.08 69.469,27.813 ; 67.888,32.08 69.291,32.08 ; 67.888,33.08 69.155,33.08 69.342,32.893 ; 67.888,35.58 69.068,35.58 69.215,35.179 ; 67.888,36.08 69.215,36.068 ; 67.888,36.58 68.957,36.58 69.215,36.957 ; 67.888,38.08 68.981,38.08 69.215,37.846 ; 67.888,41.08 69.156,41.08 ; 67.888,42.08 69.172,42.08

## Polygon pours and split planes (outlines as drawn)
DGND on Ground Plane (split plane): 117.727,0.637 0.637,0.637 0.637,70.483 117.727,70.483
+3V3 on Power Plane (split plane): 117.727,0.637 0.637,0.637 0.637,70.483 117.727,70.483

## Keep-outs
Keep-Out Layer:
  the board outline again, w1.2

## Silkscreen, mask and mechanical layers (free items; w line width, h text height)
Top Overlay:
  circle w0.254: c34.29,64.516 r3.939
  text "BoTi" at 30.988,63.373 h2

## Text inside footprints (layer, text, board x,y; h text height)
J2: Top Overlay "6" at 2.208,26.46 h1.5 r90; Top Overlay "9" at 2.208,34.77 h1.5 r90; Top Overlay "5" at 11.608,36.155 h1.5 r90; Top Overlay "1" at 11.608,25.325 h1.5 r90
J3: Top Overlay "6" at 116.056,25.483 h1.5 r270; Top Overlay "9" at 116.056,17.173 h1.5 r270; Top Overlay "5" at 106.656,15.788 h1.5 r270; Top Overlay "1" at 106.656,26.618 h1.5 r270
S1: Mechanical 16 "4" at 84.836,65.786 h1.97 r90; Mechanical 16 "3" at 84.836,57.658 h1.97 r90; Mechanical 16 "2" at 80.518,65.786 h1.97 r90; Mechanical 16 "1" at 80.391,57.912 h1.97 r90
SV1: Top Overlay "1" at 35.052,8.001 h1.97 r180; Top Overlay "2" at 35.052,5.461 h1.97 r180; Top Overlay "6" at 30.353,10.16 h1.97 r180
USB1: Top Overlay "GND" at 112.014,58.039 h0.39 r180; Top Overlay "ID" at 112.014,57.404 h0.39 r180; Top Overlay "D+" at 112.014,56.769 h0.39 r180; Top Overlay "D-" at 112.014,56.134 h0.39 r180; Top Overlay "V" at 112.014,55.372 h0.39 r180